# EAGLE board Adafruit AD5693R Breakout Board (EAGLE 9.6.2)
REV: B
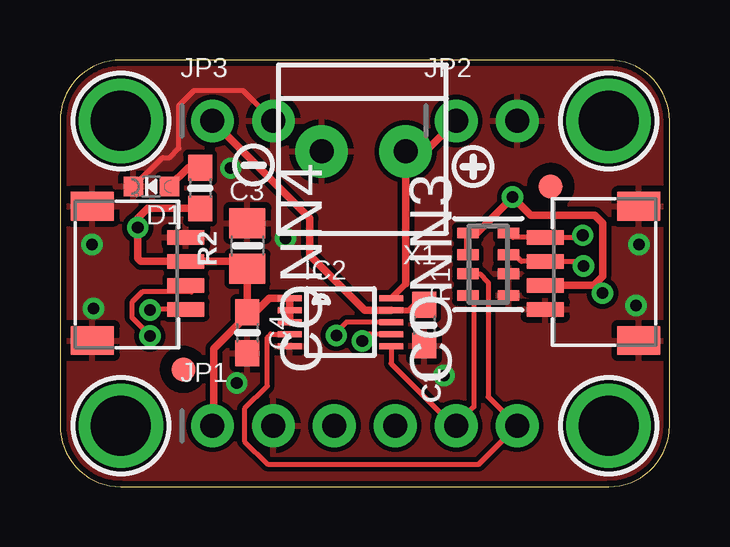
[diagram p0: board, top side]
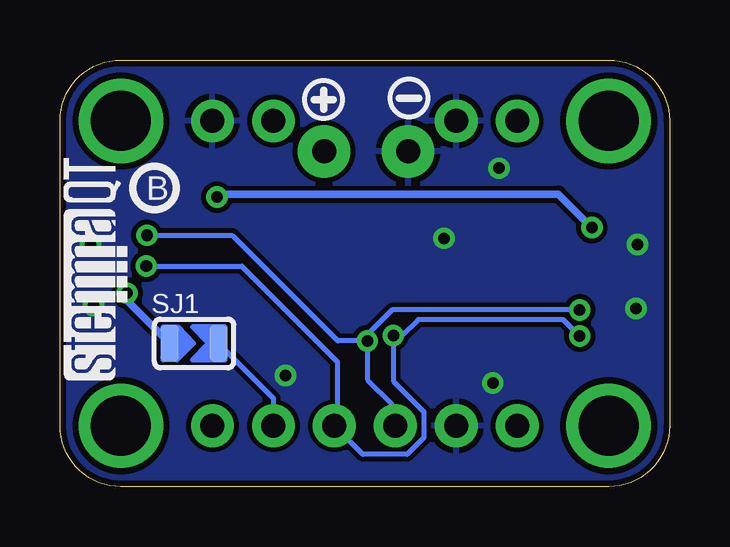
[diagram p1: board, bottom side, seen from below]

Size 25.4 x 17.78 mm. Coordinates in mm from the lower left corner, seen from the top.
Outline: 0,15.24 0,2.54 arc90 2.54,0 22.86,0 arc90 25.4,2.54 25.4,15.24 arc90 22.86,17.78 2.54,17.78 arc90 0,15.24
Copper layers (1*16): Top 0.035mm / dielectric 1.5mm / Bottom 0.035mm
Design rules "adafruit 8-8": minimum track width 6mil, minimum drill 15.5mil, track to track 8mil, track to pad 8mil, pad to pad 8mil, via to via 8mil, smd to smd 8mil, copper to edge 10mil, drill to drill 8mil, minimum pad ring 10mil, minimum via ring 8mil, stop-mask expansion 2mil, vias tented up to drill 20mil, thermal gap 10mil
Net classes: 1 highpower: width 0.305 mm, drill 0.483 mm; 2 lowpower: width 0.254 mm, drill 0.483 mm

## Footprints (pad centres in the part's own frame; a part is rotated, then mirrored left to right if it is on the bottom)
0603-NO = smd 1.075 x 1: 1 -0.85,0; 2 0.85,0
0805-NO = smd 1.24 x 1.5: 1 -0.95,0; 2 0.95,0
JST_SH4 = smd 0.6 x 1.55: 1 -1.5,2.006; 2 -0.5,2.006; 3 0.5,2.006; 4 1.5,2.006 | smd 1.2 x 1.8: MT1 -2.8,-1.894; MT2 2.8,-1.894
CHIPLED_0603_NOOUTLINE = smd 0.8 x 0.8: A 0,-0.75; C 0,0.75
FIDUCIAL_1MM = smd 1 x 1: 1 0,0
MSOP10 = smd 0.25 x 1: 1 -1,-2.113; 2 -0.5,-2.113; 3 0,-2.113; 4 0.5,-2.113; 5 1,-2.113; 6 1,2.113; 7 0.5,2.113; 8 0,2.113; 9 -0.5,2.113; 10 -1,2.113
1X06_ROUND_70 = drill 1 pad 1.778: 1 -6.35,0; 2 -3.81,0; 3 -1.27,0; 4 1.27,0; 5 3.81,0; 6 6.35,0
1X02_ROUND = drill 1 pad 1.778: 1 -1.27,0; 2 1.27,0
RESPACK_4X0603 = smd 0.45 x 0.9: 1 -1.3,-0.85; 2 -0.4,-0.85; 3 0.4,-0.85; 4 1.3,-0.85; 5 1.3,0.85; 6 0.4,0.85; 7 -0.4,0.85; 8 -1.3,0.85
SOLDERJUMPER_ARROW_NOPASTE = smd 0.762 x 1.524: 1 -1.016,0; 2 1.016,0
MOUNTINGHOLE_2.5_PLATED = drill 2.5 pad 3.2: P$1 0,0
TERMBLOCK_1X2-3.5MM = drill 1 pad 2.184: 1 1.8,0; 2 -1.7,0

## Placement (x,y rotation side)
C1  0.1uF  [0603-NO]  15.18,6.73 270 top
C3  10uF  [0805-NO]  7.81,10.03 90 top
C4  0.1uF  [0603-NO]  7.81,6.41 270 top
CONN3  STEMMA_I2C_QT  [JST_SH4]  22.23,8.89 90 top
CONN4  STEMMA_I2C_QT  [JST_SH4]  3.24,8.89 270 top
D1  GREEN  [CHIPLED_0603_NOOUTLINE]  3.81,12.51 90 top
FID3  FIDUCIAL_1MM  [FIDUCIAL_1MM]  5.14,4.89 0 top
FID4  FIDUCIAL_1MM  [FIDUCIAL_1MM]  20.45,12.51 0 top
IC2  AD5693R_10PIN_RMZ  [MSOP10]  11.68,6.86 270 top
JP1  [1X06_ROUND_70]  12.7,2.54 0 top
JP2  [1X02_ROUND]  17.78,15.24 0 top
JP3  [1X02_ROUND]  7.62,15.24 0 top
PLABEL0  [PLABEL0]  6.35,0.89 0 top
PLABEL1  [PLABEL1]  8.89,4.19 0 top
PLABEL2  [PLABEL2]  11.43,0.89 0 top
PLABEL3  [PLABEL3]  13.97,4.19 0 top
PLABEL4  [PLABEL4]  19.18,4.19 0 top
PLABEL5  [PLABEL5]  16.64,0.89 0 top
PLABEL6  [PLABEL6]  12.51,9.33 0 top
PLABEL7  [PLABEL7]  0.25,12.38 0 top
PLABEL8  [PLABEL8]  12.7,16.32 0 top
PLABEL9  [PLABEL9]  6.35,16.89 0 top
PLABEL10  [PLABEL10]  19.18,16.89 0 top
PLABEL11  [PLABEL11]  12.7,11.81 0 bottom
PLABEL12  [PLABEL12]  13.08,8.95 0 bottom
PLABEL13  [PLABEL13]  12.64,0.95 0 bottom
PLABEL14  [PLABEL14]  19.81,4.25 0 bottom
PLABEL15  [PLABEL15]  10.67,5.4 0 bottom
R1  10K Pack  [RESPACK_4X0603]  17.84,9.27 90 top
R2  10K  [0603-NO]  5.84,12.45 270 top
SJ1  [SOLDERJUMPER_ARROW_NOPASTE]  19.81,5.97 0 bottom
U$2  [SYMBOL_PLUS]  17.21,13.34 0 top
U$4  [SYMBOL_MINUS]  8.06,13.4 0 top
U$5  [SYMBOL_MINUS]  10.86,16.19 0 bottom
U$7  [SYMBOL_PLUS]  14.41,16.13 0 bottom
U$8  [PCBFEAT-REV-040]  21.46,12.45 0 bottom
U$20  MOUNTINGHOLE2.5  [MOUNTINGHOLE_2.5_PLATED]  2.54,15.24 0 top
U$21  MOUNTINGHOLE2.5  [MOUNTINGHOLE_2.5_PLATED]  22.86,15.24 0 top
U$25  MOUNTINGHOLE2.5  [MOUNTINGHOLE_2.5_PLATED]  2.54,2.54 0 top
U$27  MOUNTINGHOLE2.5  [MOUNTINGHOLE_2.5_PLATED]  22.86,2.54 0 top
U$31  [STEMMAQT]  22.61,4.45 90 bottom
X1  3.5mm Terminal Block  [TERMBLOCK_1X2-3.5MM]  12.7,13.97 180 top

## Library data of the parts
C1 C3 C4 JP1-JP3 R1 R2 U$2 U$4 U$5 U$7 = microbuilder
CONN3 CONN4 = adafruit_electromech; LCSC: C2845363
D1 = microbuilder; ROT: 270
FID3 FID4 SJ1 = microbuilder; BOM: EXCLUDE
IC2 = adafruit_sensor
PLABEL0 PLABEL1-PLABEL15 = pinguin
U$8 = microbuilder; REV: B
U$20 U$21 U$25 U$27 = adafruit_electromech; BOM: EXCLUDE
U$31 = silks
X1 = adafruit_electromech; ROT: 180

## Nets
!LDAC: IC2.4 JP1.6 R1.7
A0: IC2.6 JP1.5 R1.8 SJ1.2
GND: C1.2 C3.2 C4.2 CONN3.1 CONN3.MT1 CONN3.MT2 CONN4.1 CONN4.MT1 CONN4.MT2 D1.C IC2.5 JP1.2 JP2.2 JP3.2 R1.1 R1.2 X1.1
N$1: D1.A R2.1
SCL: CONN3.4 CONN4.4 IC2.7 JP1.3 R1.4
SDA: CONN3.3 CONN4.3 IC2.8 JP1.4 R1.3
VCC [highpower]: C3.1 C4.1 CONN3.2 CONN4.2 IC2.1 IC2.2 IC2.3 JP1.1 R1.5 R1.6 R2.2 SJ1.1
VOUT: IC2.10 JP2.1 X1.2
VREF: C1.1 IC2.9 JP3.1

## Tracks (layer width: path | path; a pad name or v marks a point on that pad's centre or on a via)
!LDAC
  Top 0.203: R1.7 17.5,8.87 17.84,8.53 17.84,3.75 JP1.6 17.45,0.94 8.65,0.94 7.68,1.91 7.68,3.24 8.64,4.19 8.64,6.22 8.77,6.36 IC2.4
A0
  Top 0.203: R1.8 17.25,7.72 17.25,3.33 16.48,2.56 JP1.5 16.38,2.54 13.8,5.13 IC2.6
  Bottom 0.203: SJ1.2 16.51,3.68 JP1.5
GND  (via drill 0.48)
  Top 0.203: D1.C 4.27,13.72 4.57,13.72 4.95,14.1 4.95,15.88 5.59,16.51 7.62,16.51 JP3.2
  other vias: 7.37,4.32 1.33,10.1 1.4,7.43 24.13,10.1 24,7.56 9.4,10.35 7.11,13.27 16,4.64
  pour Top: 0,17.78 25.4,17.78 25.4,0 0,0
  pour Bottom: 0,17.78 25.4,17.78 25.4,0 0,0
N$1
  Top 0.305: D1.A 5.35,13.3 R2.1
SCL  (via drill 0.48)
  Top 0.203: R1.4 18.88,10.39 CONN3.4 21.69,10.39 v21.78,10.48 | CONN4.4 3.77,7.39 v3.75,7.37 | IC2.7 12.88,6.36 v12.6,6.07
  Bottom 0.203: v21.78,10.48 18.22,10.48 13.82,6.07 v12.6,6.07 | v3.75,7.37 11.56,7.37 12.76,6.16 12.68,6.07 v12.6,6.07 | v12.6,6.07 12.6,4.47 11.56,3.43 11.56,2.67 JP1.3
SDA  (via drill 0.48)
  Top 0.203: R1.3 18.95,9.67 19.23,9.39 CONN3.3 21.61,9.39 v21.81,9.19 | v3.75,6.27 3.75,6.31 3,7.06 3,7.68 3.44,8.12 5.48,8.12 CONN4.3 | IC2.8 11.94,6.86 11.45,6.37 v11.51,6.31
  Bottom 0.203: v21.81,9.19 17.83,9.19 13.84,5.21 13.84,2.67 JP1.4 12.78,1.35 10.94,1.35 10.24,2.05 10.24,3.12 11.51,4.4 v11.51,6.31 11.13,6.31 10.48,6.96 4.43,6.96 v3.75,6.27
VCC  (via drill 0.48)
  Top 0.305: C4.1 C3.1 7.5,9.39 CONN4.2 3.37,9.39 3.24,9.53 v3.24,10.79 3.24,11.18 3.66,11.6 R2.2 | C4.1 8.13,7.26 8.72,7.86 IC2.1 IC2.2 IC2.3 | R1.6 R1.5 17.37,10.57 v18.86,12.06 19.62,11.3 22.29,11.3 22.61,10.99 22.61,8.76 22.23,8.39 | 22.23,8.39 CONN3.2 | C4.1 7.81,7.15 6.41,5.75 6.41,2.6 JP1.1 | 22.23,8.39 22.28,8.39 v22.61,8.06
  Bottom 0.305: SJ1.1 22.61,7.75 v22.61,8.06 | v18.86,12.06 18.73,12.19 4.64,12.19 v3.24,10.79
VOUT
  Top 0.254: 14.4,8.46 IC2.10
  Top 0.305: JP2.1 15.24,13.97 X1.2 14.4,8.46
VREF
  Top 0.254: IC2.9 14.56,7.36 14.78,7.58 C1.1
  Top 0.305: IC2.9 12.71,7.36 10.41,9.65 10.41,11.18 JP3.1

## Text on the board
Pinguin_tBackup: VREF | GND | optional / terminal | on | AD5693 | GND | SDA | LDAC | VIN | SCL | A0
Pinguin_bBackup: AD5693R | 16-bit I2C DAC / w/Internal 2.5V Ref | Default I2C Addr 0x4C | 0x4E | VLogic/Vcc: 3-5VDC